# Altium PCB Copy of PCB2.PcbDoc
Units mil, origin at the board's own origin, x right, y up, seen from the top; angles counter-clockwise.
Board outline 6000 x 4000 mil, 2 copper layers (Top Layer, Bottom Layer); 32 components, 20 nets, 111 pads, 0 vias.
Unrouted connection lines stored in the file: 67.
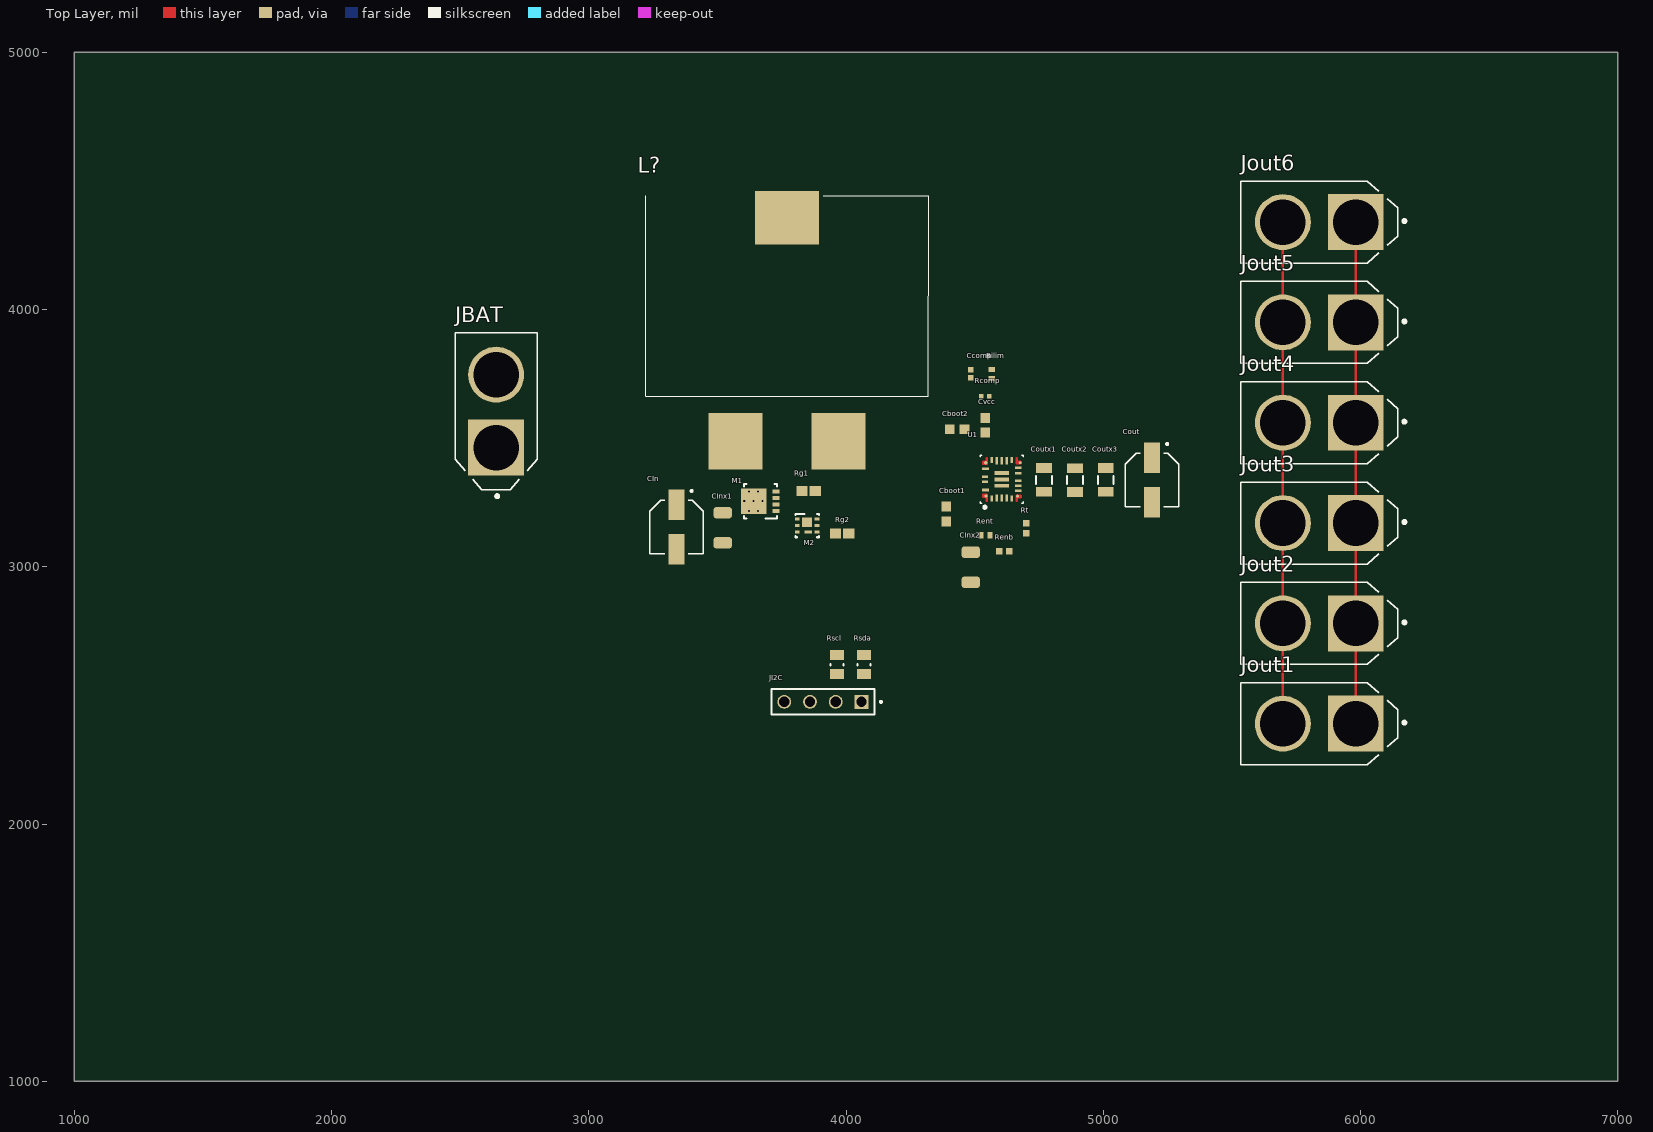
[diagram p0: Top Layer view]
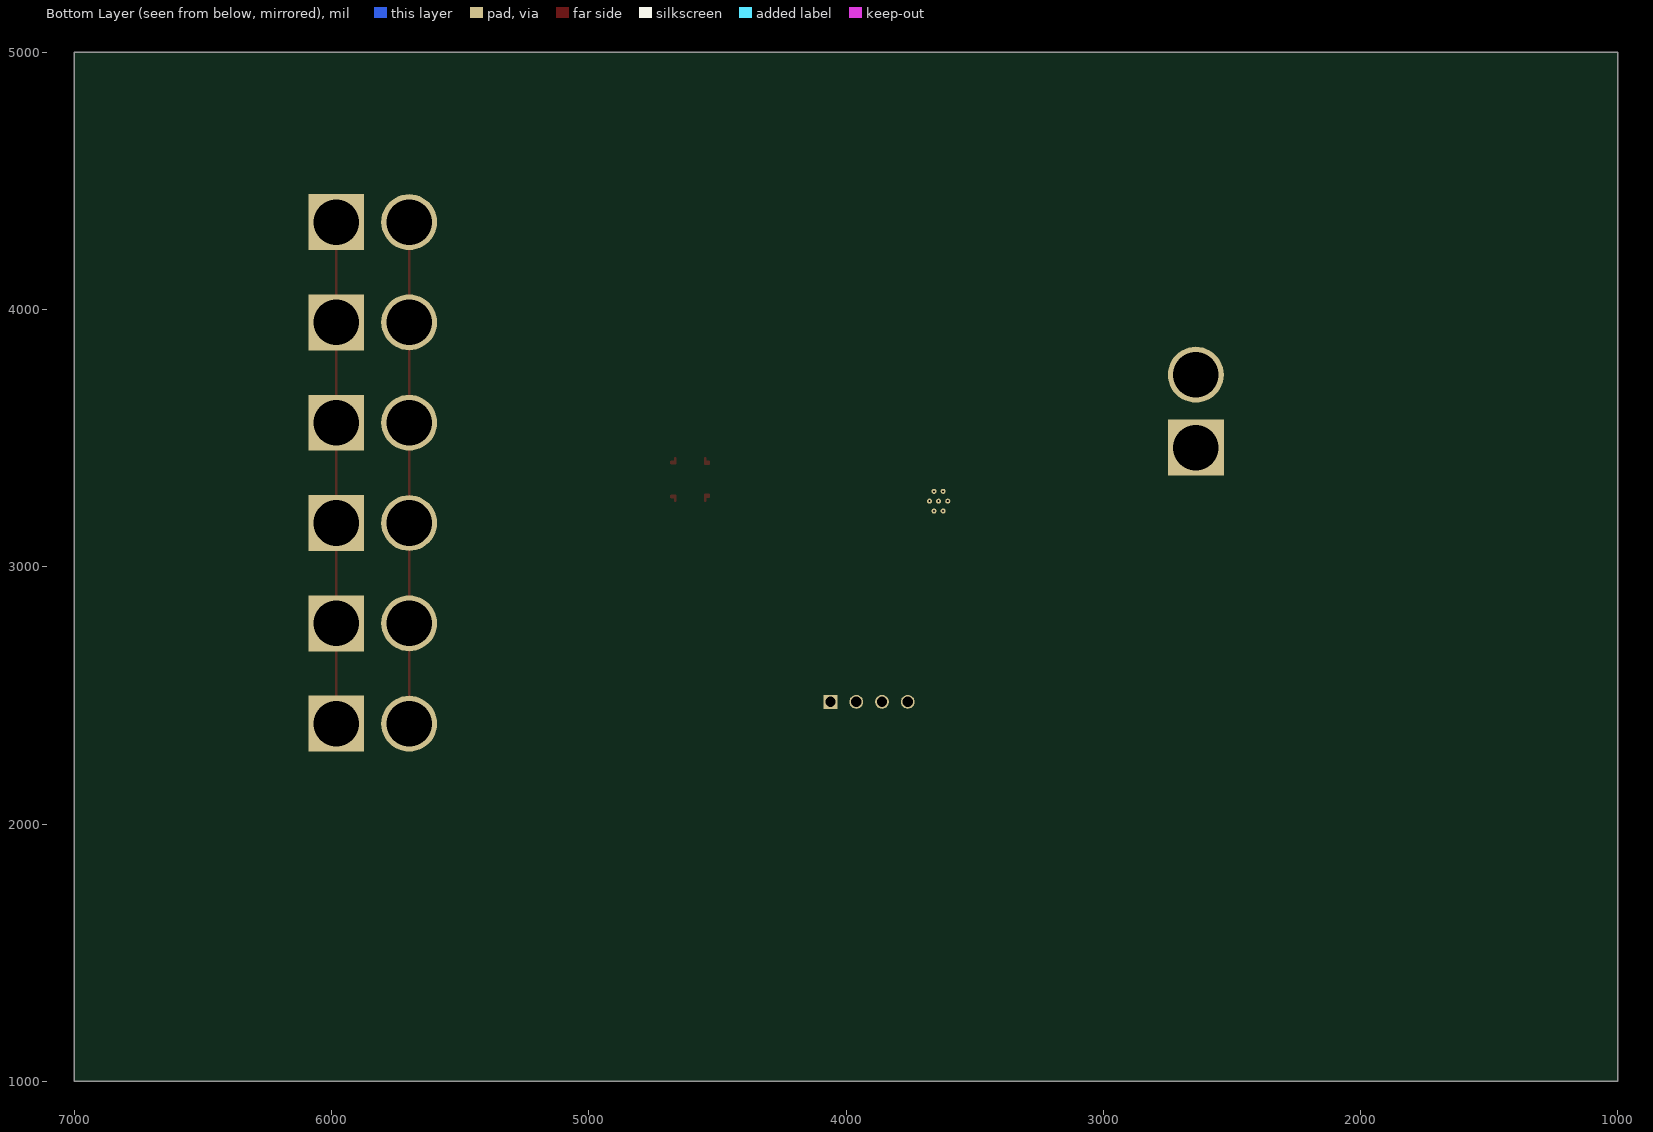
[diagram p1: Bottom Layer view, seen from below]

## Layer stack, top to bottom
Top Solder: solder mask 0.4, Solder Resist, Dk 3.5
Top Layer: signal copper 1.4
Dielectric 1: dielectric 12.6, FR-4, Dk 4.8
Bottom Layer: signal copper 1.4
Bottom Solder: solder mask 0.4, Solder Resist, Dk 3.5

## Board outline
1000,1000 7000,1000 7000,5000 1000,5000

## Design rules (kind name [scope] priority, off if disabled: settings)
Clearance [All] p1: gap=10 ignorepadtopadclearanceinfootprint=FALSE except(0: Arc-Hole Track-Hole SMDPad-Hole THPad-Hole Via-Hole Fill-Hole Poly-Hole Region-Hole Text-Hole)
PolygonConnect [All] p1: connectstyle=Relief reliefconductorwidth=10 reliefentries=4 polygonreliefangle="90 Angle" airgapwidth=10
RoomDefinition Sheet2 [InComponentClass('Sheet2')] p1 off: confinementstyle=ConfineIn formatcopy=TRUE lockcomponents=FALSE outline 1227.44,1625 6630,1625 6630,5105 1227.44,5105
RoutingVias [All] p1: holewidth=28 width=50 viastyle="Through Hole" minholewidth=28 minwidth=50 maxholewidth=28 maxwidth=50
SolderMaskExpansion [All] p1: expansion=4 istentingtop=FALSE
Width [All] p1: maxlimit=100 minlimit=10 preferedwidth=20 minimp=50.000000 maximp=50.000000 favimp=50.000000
30 further rules are at their usual default settings.

## Components (designator, comment, footprint, x,y, rotation, side; value= is the part's Value field where it differs from the comment)
Cboot1 "EMK107B7104KA-T" CAPC1608X90N#1 4390,3205 r90 top
Cboot2 "EMK107B7104KA-T" CAPC1608X90N#1 4431.67,3535 r180 top
Ccomp "GRM155R71C472KA01D" CAPC1005X55X25LL05T10 4485,3750 r90 top
CIn "20SVF56M" CAP_20SVF56M 3340.7,3155 r270 top (schematic designator Cin)
CInx1 "GRM31CR71E475KA88L" CAP3216X125N 3520.7,3151.54 r270 top (schematic designator Cinx1)
CInx2 "GRM31CR71E475KA88L" CAP3216X125N 4485,2998.3 r270 top (schematic designator Cinx2)
Cout "20SVF56M" CAP_20SVF56M 5189.42,3337.48 r270 top
Coutx1 "C2012X7S1E106K125AC" FP-C2012-125-IPC_A 4770,3337.48 r270 top
Coutx2 "C2012X7S1E106K125AC" FP-C2012-125-IPC_A 4890,3337.2 r270 top
Coutx3 "C2012X7S1E106K125AC" FP-C2012-125-IPC_A 5010,3337.48 r270 top
Cvcc "C1608X6S1C475K080AC" CAPC1608X90N#2 4541.67,3550 r270 top
JBAT "XT60-M" AMASS_XT60-M 2640,3605 r90 top
JI2C "TSW-104-26-F-S" SAMTEC_TSW-104-26-F-S 4060,2475 r180 top
Jout1 "XT60-M" AMASS_XT60-M 5840,2390 r180 top
Jout2 "XT60-M" AMASS_XT60-M 5840,2780 r180 top
Jout3 "XT60-M" AMASS_XT60-M 5840,3170 r180 top
Jout4 "XT60-M" AMASS_XT60-M 5840,3560 r180 top
Jout5 "XT60-M" AMASS_XT60-M 5840,3950 r180 top
Jout6 "XT60-M" AMASS_XT60-M 5840,4340 r180 top
L? "PQ2614BLA-100K" PQ2614BLA100K 3771.46,3964.73 r0 top
M1 "CSD17577Q3A" DNH0008A 3667.46,3255 r180 top
M2 "CSD16301Q2" DQK0006C 3848.89,3160 r0 top
Rcomp "CRCW040247K5FKTD" RESC1005X40X25LL05T05 4541.67,3662.48 r180 top
Renb "CRCW0402100KFKTD" RESC1005X40X25ML05T05 4615,3060 r180 top
Rent "CRCW0402634KFKED" RESC1005X40N 4542.52,3122.48 r180 top
Rg1 "RC0603FR-071RL" RESC1608X55N 3855,3295 r0 top
Rg2 "RC0603FR-071RL" RESC1608X55N 3985,3130 r0 top
Rilim "RMCF0402FT21K0" RESC1005X40N 4566.67,3750 r270 top
Rscl "CRCW08054K70FKEA" FP-CRCW0805-e3-IPC_B 3965,2620 r90 top
Rsda "CRCW08054K70FKEA" FP-CRCW0805-e3-IPC_B 4070,2620 r90 top
Rt "CRCW040266K5FKED" RESC1005X40X25ML05T05 4700,3150 r90 top
U1 "TPS55288QRPMRQ1" RPM0026A-MFG 4605.53,3339.74 r90 top

## Footprints (in the part's own frame and the unit in brackets; to place one, negate y for a bottom-side part, rotate by r counter-clockwise, add the part's x,y. Pads: shape width x height; smd on the part's side, far side on the other; paste and mask are expansions set on the pad)
AMASS_XT60-M [mm]
  rect 5.516x5.516 hole 4.5: 1(-3.6,0)
  round 5.516 hole 4.5: 2(3.6,0)
  silkscreen extent -8.55,-4.05 7.75,4.05
CAP3216X125N [mm]
  rrect54% 1.15x1.82 smd: 1(-1.485,0) 2(1.485,0)
CAP_20SVF56M [mm]
  rect 3x1.6 smd: 1(-2.2,0) 2(2.2,0)
  silkscreen extent -3.65,-2.65 2.65,2.65, body extent -3,-2.65 3,2.65, height 5.9
CAPC1005X55X25LL05T10 [mm] "Chip Capacitor, 2-Leads, Body 1.00x0.50mm, IPC High Density"
  rect 0.56x0.52 smd: 1(-0.39,0) 2(0.39,0)
  body extent -0.53,-0.28 0.53,0.28, height 0.55
CAPC1608X90N#1 [mm]
  rect 0.95x0.93 smd: 1(-0.738,0) 2(0.738,0)
  body extent -0.8,-0.4 0.8,0.4, height 0.9
CAPC1608X90N#2 [mm]
  rect 1.01x0.93 smd: 1(-0.709,0) 2(0.709,0)
  body extent -0.8,-0.4 0.8,0.4, height 0.9
DNH0008A [mm]
  rect 0.7x0.4 smd paste-0.05 mask-0.051: 1(-1.55,0.975) 2(-1.55,0.325) 3(-1.55,-0.325) 4(-1.55,-0.975) 5(1.55,-0.975) 6(1.55,-0.325) 7(1.55,0.325) 8(1.55,0.975)
  rect 2.51x2.55 smd paste-1.262 mask-1.257: 9(0.645,0)
  round 0.5 hole 0.203 mask+0: V(-0.208,0) V(0.245,0.975) V(0.245,-0.975) V(0.697,0) V(1.15,0.975) V(1.15,-0.975) V(1.602,0)
  silkscreen extent -1.62,-1.7 1.62,1.7, body extent 0,0 0.25,0.25, height 0.25
DQK0006C [mm]
  rect 0.45x0.3 smd paste+0 mask+0.051: 1(-0.975,0.65) 2(-0.975,0) 3(-0.975,-0.65) 4(0.975,-0.65) 5(0.975,0) 6(0.975,0.65)
  rect 0.75x0.3 smd paste-0.362 mask+0.051: 7(0.095,-0.65)
  rect 1x0.95 smd paste-0.487 mask+0.051: 8(0,0.325)
  silkscreen extent -1.15,-1.15 1.15,1.15, body extent 0,0 0.25,0.25, height 0.25
FP-C2012-125-IPC_A [mm]
  rect 0.956x1.556 smd paste+0 mask+0: 1(-1.175,0) 2(1.175,0)
  silkscreen extent -0.4,-0.78 0.4,0.78, body extent -2.15,-1.28 2.15,1.28, height 0.25
FP-CRCW0805-e3-IPC_B [mil]
  rect 39.63x55.44 smd paste+0 mask+0: 1(-37.44,0) 2(37.44,0)
  silkscreen extent -3,-25 3,25, body extent -67,-38 67,38, height 10
PQ2614BLA100K [mm]
  rect 5.33x5.59 smd: 1(-5.1,-12.128) 3(5.05,-12.128)
  rect 6.35x5.28 smd: 2(-0.025,9.947)
  silkscreen extent -13.98,-7.67 13.98,12.13
RESC1005X40N [mm]
  rect 0.51x0.6 smd: 1(-0.445,0) 2(0.445,0)
  body extent -0.5,-0.25 0.5,0.25, height 0.4
RESC1005X40X25LL05T05 [mm] "Chip Resistor, 2-Leads, Body 1.00x0.50mm, IPC High Density"
  rect 0.45x0.45 smd: 1(-0.4,0) 2(0.4,0)
  body extent -0.53,-0.27 0.53,0.28, height 0.4
RESC1005X40X25ML05T05 [mm] "Chip Resistor, 2-Leads, Body 1.00x0.50mm, IPC Low Density"
  rect 0.65x0.65 smd: 1(-0.5,0) 2(0.5,0)
  body extent -0.53,-0.27 0.53,0.28, height 0.4
RESC1608X55N [mm]
  rect 1.1x1 smd: 1(-0.65,0) 2(0.65,0)
  body extent -0.8,-0.4 0.8,0.4, height 0.55
RPM0026A-MFG [mm]
  round 0.306 smd paste+0 mask+0: 1(-1.661,1.555)
  rect 0.6x0.25 smd paste+0 mask+0: 2(-1.9,1) 6(-1.9,-1) 14(1.9,-1) 18(1.9,1)
  rect 0.725x0.25 smd paste+0 mask+0: 3(-1.837,0.5) 4(-1.837,0) 5(-1.837,-0.5) 15(1.837,-0.5) 16(1.837,0) 17(1.837,0.5)
  round 0.29 smd paste+0 mask+0: 7(-1.661,-1.554)
  rect 0.25x0.625 smd paste+0 mask+0: 8(-1.125,-1.637) 9(-0.625,-1.637) 10(-0.125,-1.637) 11(0.625,-1.637) 12(1.125,-1.637)
  round 0.259 smd paste+0 mask+0: 13(1.644,-1.805)
  round 0.332 smd paste+0 mask+0: 19(1.641,1.591)
  rect 0.25x0.675 smd paste+0 mask+0: 20(1.05,1.613) 23(-1.05,1.613)
  rect 0.25x0.6 smd paste+0 mask+0: 21(0.25,1.65) 22(-0.25,1.65)
  rect 0.375x1.425 smd paste+0 mask+0: 24(-0.625,0) 25(0,0) 26(0.625,0)
  Top Layer region: 2.15,-1.599 2.2,-1.549 2.2,-1.424 2.15,-1.374 1.55,-1.374 1.5,-1.424 1.5,-1.899 1.55,-1.949 1.8,-1.949 1.85,-1.899 1.85,-1.599
  Top Layer region: -2.15,-1.599 -2.2,-1.549 -2.2,-1.424 -2.15,-1.374 -1.55,-1.374 -1.5,-1.424 -1.5,-1.899 -1.55,-1.949 -1.8,-1.949 -1.85,-1.899 -1.85,-1.599
  Top Layer region: 2.2,1.425 2.2,1.425 2.2,1.55 2.15,1.6 1.825,1.6 1.825,1.9 1.775,1.95 1.475,1.95 1.425,1.9 1.425,1.425 1.475,1.375 2.15,1.375
  Top Layer region: -2.15,1.375 -2.2,1.425 -2.2,1.55 -2.15,1.6 -1.825,1.6 -1.825,1.9 -1.775,1.95 -1.475,1.95 -1.425,1.9 -1.425,1.425 -1.475,1.375
  silkscreen extent -2.87,-2.12 2.37,2.12, body extent 0,0 0.25,0.25, height 0.25
SAMTEC_TSW-104-26-F-S [mm]
  rect 1.37x1.37 hole 1.02: 01(0,0)
  round 1.37 hole 1.02: 02(2.54,0) 03(5.08,0) 04(7.62,0)
  silkscreen extent -2.02,-1.27 8.89,1.27

## Part data
Cboot1 Cboot2: "Ceramic Multilayer Capacitor; Capacitor Type:General Purpose; Capacitance:0.1ÂµF; Capacitance Tolerance:Â± 10%; Voltage Rating:16VDC; Capacitor Dielectric Type:Multilayer Ceramic; Package/Case:0603; Termination Type:SMD ;RoHS Compliant: Yes", Package=None, Availability=Unavailable, MF="{'manufacturer': u'Taiyo Yuden'}", MP=EMK107B7104KA-T, Price=None
Ccomp: library part CMP-2008-04609-1, Manufacturer=Murata, Part Number=GRM155R71C472KA01D
CIn Cout JI2C: Package=None, Availability=Unavailable, Price=None
  CIn Cout: MF="{'manufacturer': u'Panasonic'}", MP=20SVF56M
  JI2C: MF="{'manufacturer': u'Samtec'}", MP=TSW-104-26-F-S
CInx1 CInx2: library part GRM31CR71H475KA12L, "Cap Ceramic 4.7uF 50V X7R 10% Pad SMD 1206 125C T/R", Package=None, Availability=Unavailable, MF="{'manufacturer': u'Murata'}", MP=GRM31CR71H475KA12L, Price=None
Coutx1 Coutx2 Coutx3: library part CMP-08246-000200-1, "CAP CER 10UF 25V X7S 0805"
Cvcc: "Cap Ceramic 4.7uF 16V X6S 10% SMD 0603 105Â°C Punched Paper T/R", Package=None, Availability=Unavailable, MF="{'manufacturer': u'TDK'}", MP=C1608X6S1C475K080AC, Price=None
JBAT Jout1 Jout2 Jout3 Jout4 Jout5 Jout6: "Plug; DC supply; XT60; male; PIN: 2; for cable; soldered; 30A; 500V", Package="Package Analog Devices", Availability=Unavailable, MF=AMASS, MP=XT60-M, Price=None, SnapEDA_Link=https://www.snapeda.com/parts/XT60-M/AMASS/view-part/2883912/?ref=snap
L?: "Inductor", Manufacturer_Name=Bourns, Mouser Part Number=652-PQ2614BLA-100K, Arrow Part Number=PQ2614BLA-100K, Arrow Price/Stock=https://www.arrow.com/en/products/pq2614bla-100k/bourns, Datasheet Link=https://www.mouser.com/datasheet/2/54/bourns_PQ2614BLA_BHA_datasheet-1159238.pdf, Height=16mm, Manufacturer_Part_Number=PQ2614BLA-100K, Mouser Price/Stock=https://www.mouser.co.uk/ProductDetail/Bourns/PQ2614BLA-100K?qs=1mbolxNpo8dMKwtGfSvUcA%3D%3D
M1: "No Description Available", Mfr_Name="Texas Instruments", VALUE_2=Value, Copyright="Copyright (C) 2022 Ultra Librarian. All rights reserved.", Manufacturer_Part_Number=CSD17577Q3A, RefDes=RefDes, REFDES_2=RefDes, Type=DEV, TYPE_2=TYPE
M2 U1: "No Description Available", Mfr_Name="Texas Instruments", Copyright="Copyright (C) 2022 Ultra Librarian. All rights reserved.", RefDes=RefDes, Type=DEV
  M2: Manufacturer_Part_Number=CSD16301Q2
  U1: Digi-Key_Part_Number_1=296-TPS55288QRPMRQ1TR-ND, Digi-Key_Part_Number_2=296-TPS55288QRPMRQ1CT-ND, Digi-Key_Part_Number_3=296-TPS55288QRPMRQ1DKR-ND, Manufacturer_Part_Number=TPS55288QRPMRQ1
Rcomp: library part CMP-2002-00418-1, Manufacturer="Vishay Dale", Part Number=CRCW040247K5FKTD
Renb: library part CMP-1011-00736-2, Manufacturer="Vishay Dale", Part Number=CRCW0402100KFKTD
Rent: "RES, THICK FILM, 634K, 1%, 0.063W, 0402", Package=None, Availability=Unavailable, MF="{'manufacturer': u'Vishay Dale'}", MP=CRCW0402634KFKED, Price=None
Rg1 Rg2: "Resistor", Manufacturer_Name="YAGEO (PHYCOMP)", Mouser Part Number=603-RC0603FR-071RL, Arrow Part Number=RC0603FR-071RL, Arrow Price/Stock=https://www.arrow.com/en/products/rc0603fr-071rl/yageo, Datasheet Link=https://datasheet.datasheetarchive.com/originals/distributors/Datasheets_SAMA/902f9e387b938f871d31120f5fc1d65e.pdf, Height=0.55mm, Manufacturer_Part_Number=RC0603FR-071RL, Mouser Price/Stock=https://www.mouser.co.uk/ProductDetail/YAGEO/RC0603FR-071RL?qs=VU8sRB4EgwCpR02Ip%252BqS4Q%3D%3D
Rilim: "Resistor", Manufacturer_Name="Stackpole Electronics Inc.", Datasheet Link=https://www.seielect.com/catalog/sei-rmcf_rmcp.pdf, Height=0.4mm, Manufacturer_Part_Number=RMCF0402FT21K0
Rscl Rsda: library part CMP-2100-03615-2, "RES Thick Film, 4.7kΩ, 1%, 0.125W, 100ppm/°C, 0805", Case Code (Imperial)=0805, Case Code (Metric)=2012, Max Operating Temperature=155°C, Max Power Dissipation=125mW, Min Operating Temperature=-55°C, Package Quantity=10, Resistance=4.7kR, Temperature Coefficient=100ppm/°C, Tolerance=1%, Voltage Rating=150V, Case/Package=0805, Composition="Thick Film", Contact Plating=Tin, Depth=1.25mm, Features="Automotive AEC-Q200", Height=0.45mm, Lead Free="Lead Free", Length=2mm, Military Standard=Not, Number of Terminations=2, Packaging="Tape and Reel", Power Rating=125mW, Radiation Hardening=No, Termination=SMD/SMT, Voltage Rating (DC)=150V, Weight=0.000194oz, Width=1.25mm
Rt: library part CMP-2002-00162-1, Manufacturer="Vishay Dale", Part Number=CRCW040266K5FKED

## Nets (pads, with @x,y where several pads share a name; then routed paths per layer and width w, separated by ;. In a path a pad name is that pad's centre, name@x,y a point inside that pad or via, vN(x,y) a via of type N, cw(c..) or ccw(c..) an arc to the next point about the centre after c; other vN are vias at no path point)
GND: CIn.2 CInx1.2 CInx2.2 Cout.2 Coutx1.2 Coutx2.2 Coutx3.2 Cvcc.1 JBAT.1 JI2C.04 Jout1.1 Jout2.1 Jout3.1 Jout4.1 Jout5.1 Jout6.1 M2.4 M2.7 Rcomp.1 Renb.1 Rilim.2 Rt.1 U1.7 U1.9 U1.10 U1.15 U1.24 | length 1950
  Top Layer w10: Jout1.1 Jout2.1 Jout3.1 Jout4.1 Jout5.1 Jout6.1
NetCboot1_1: Cboot1.1 L?.1 M1.1 M1.2 M1.3 M2.1 M2.2 M2.5 M2.6 M2.8 U1.23
NetCboot1_2: Cboot1.2 U1.22
NetCboot2_1: Cboot2.1 U1.20
NetCboot2_2: Cboot2.2 L?.3 U1.21 U1.25
NetCcomp_1: Ccomp.1 Rcomp.2
NetCcomp_2: Ccomp.2 U1.18
NetCout_1: Cout.1 Coutx1.1 Coutx2.1 Coutx3.1 Jout1.2 Jout2.2 Jout3.2 Jout4.2 Jout5.2 Jout6.2 U1.11 U1.12 U1.13 U1.26 | length 1950
  Top Layer w10: Jout1.2 Jout2.2 Jout3.2 Jout4.2 Jout5.2 Jout6.2
NetCvcc_2: Cvcc.2 U1.19
NetJI2C_01: JI2C.01 Rscl.1 Rsda.1
NetJI2C_02: JI2C.02 Rscl.2 U1.5
NetJI2C_03: JI2C.03 Rsda.2 U1.6
NetM1_4: M1.4 Rg1.1
NetM2_3: M2.3 Rg2.1
NetRenb_2: Renb.2 Rent.1 U1.4
NetRg1_2: Rg1.2 U1.2
NetRg2_2: Rg2.2 U1.1
NetRilim_1: Rilim.1 U1.17
NetRt_2: Rt.2 U1.8
VCC: CIn.1 CInx1.1 CInx2.1 JBAT.2 M1.5 M1.6 M1.7 M1.8 M1.9 Rent.2 U1.3
pads on no net: L?.2 M1.V U1.14 U1.16